# Altium PCB CH340G_Test.PcbDoc
Units mil, origin at the board's own origin, x right, y up, seen from the top; angles counter-clockwise.
Board outline 1720 x 535 mil, 2 copper layers (Top Layer, Bottom Layer), stack 44.685 mil thick; 21 components, 17 nets, 88 pads, 19 vias.
Unrouted connection lines stored in the file: 8.
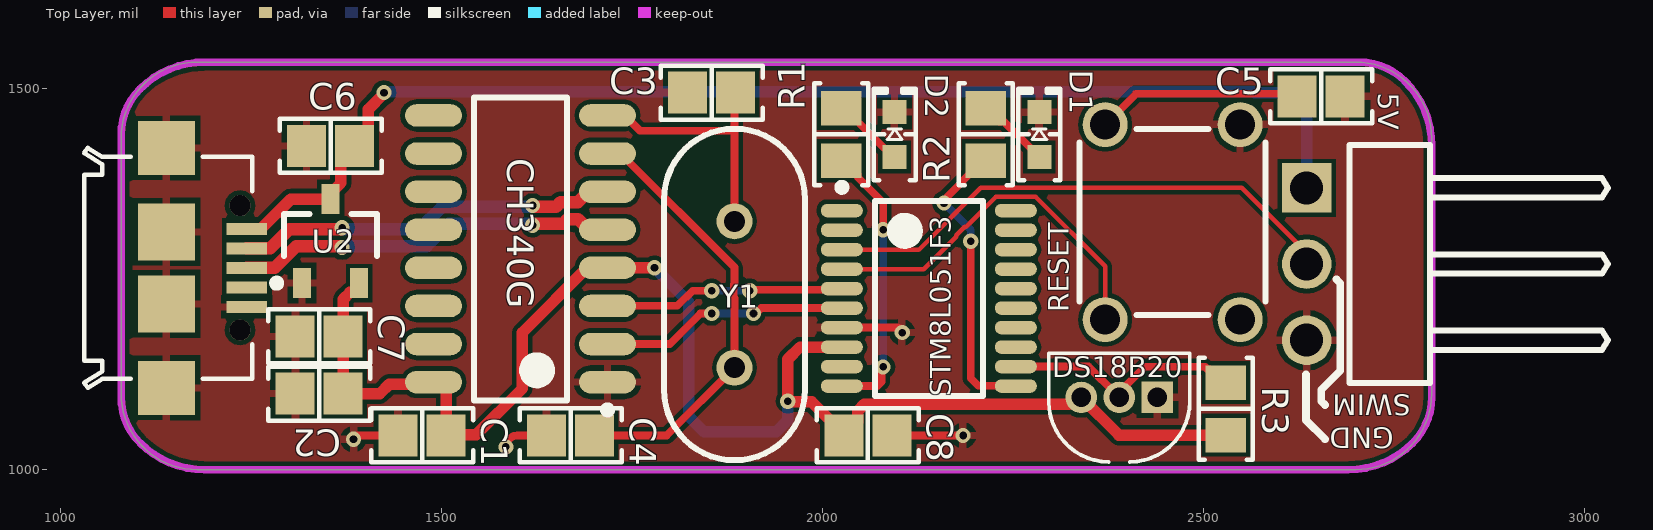
[diagram p0: Top Layer view]
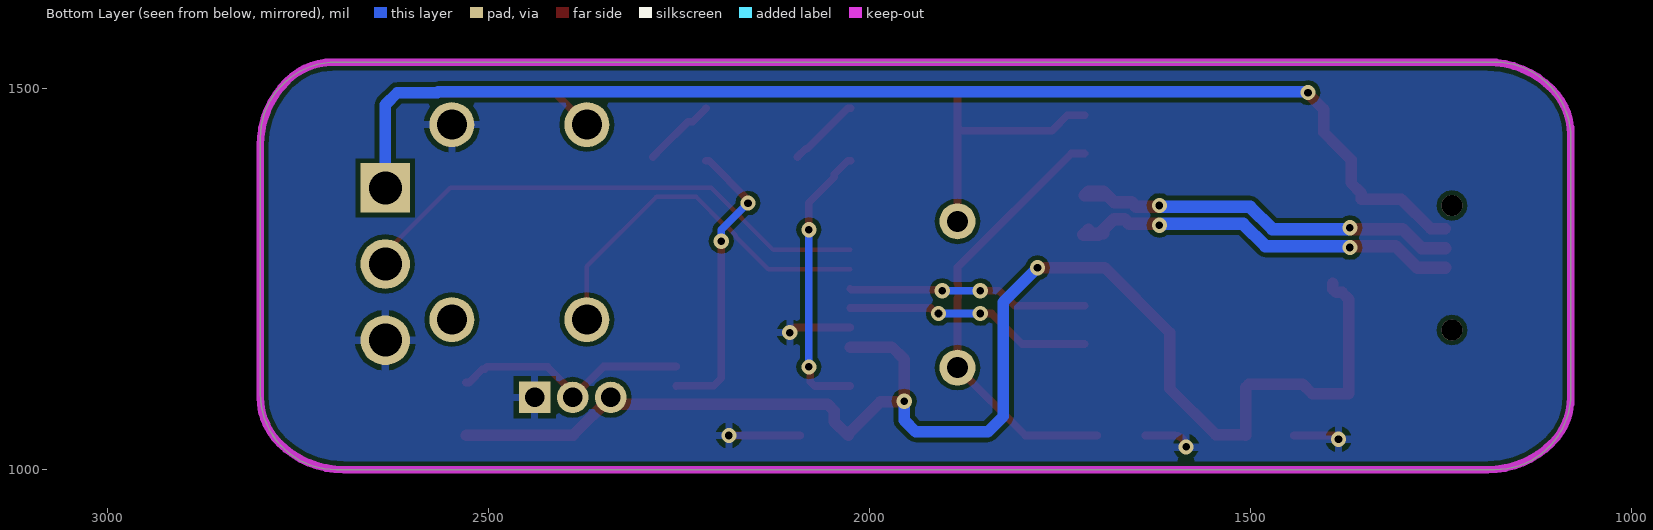
[diagram p1: Bottom Layer view, seen from below]
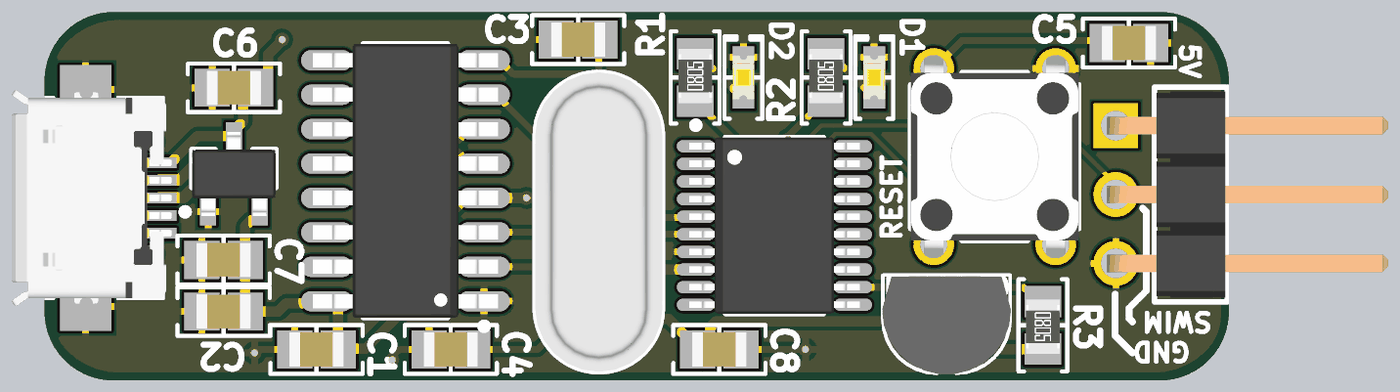
[diagram p2: 3D render of the assembled board from above, using the file's embedded part models]

## Layer stack, top to bottom
Top Solder: solder mask 0.4, Solder Resist, Dk 3.5
Top Layer: signal copper 1.378
Dielectric 1: dielectric 41.9291, FR-4, Dk 4.8
Bottom Layer: signal copper 1.378
Bottom Solder: solder mask 0.4, Solder Resist, Dk 3.5

## Board outline
2700,1535 cw(c2700,1435) 2800,1435 2800,1100 cw(c2700,1100) 2700,1000 1180,1000 cw(c1180,1100) 1080,1100 1080,1435 cw(c1180,1435) 1180,1535

## Design rules (kind name [scope] priority, off if disabled: settings)
Clearance [All] p1: gap=6 ignorepadtopadclearanceinfootprint=FALSE
DiffPairsRouting [InDifferentialPair('D')] p1: maxlimit=12 minlimit=6 mostfreqgap=6 toplayer_minwidth=6 toplayer_maxwidth=16.27 toplayer_prefwidth=16.27 bottomlayer_minwidth=6 bottomlayer_maxwidth=16.27 bottomlayer_prefwidth=16.27 maxuncoupledlength=500
PlaneConnect [All] p1: planeconnectstyle=Relief reliefexpansion=15 reliefentries=4 reliefconductorwidth=10 reliefairgap=5
PolygonConnect [All] p1: connectstyle=Relief reliefconductorwidth=10 reliefentries=4 polygonreliefangle="90 Angle" airgapwidth=7
RoutingVias [All] p1: holewidth=10 width=20 viastyle="Through Hole" minholewidth=10 minwidth=20 maxholewidth=50 maxwidth=60
SolderMaskExpansion [All] p1: expansion=4 istentingtop=FALSE
Width [All] p1: maxlimit=15 minlimit=6 preferedwidth=6 checkconnectedcopper=TRUE
28 further rules are at their usual default settings.

## Classes and differential pairs
differential pair D: +D_P -D_N

## Components (designator, comment, footprint, x,y, rotation, side; value= is the part's Value field where it differs from the comment)
C1 "100nF" "CAP 0805_2012" 1475,1045 r0 top value=0.1µF
C2 "100nF" "CAP 0805_2012" 1340,1100 r0 top value=0.1µF
C3 "15pF" "CAP 0805_2012" 1855,1495 r0 top
C4 "15pF" "CAP 0805_2012" 1670,1045 r0 top
C5 "100nF" "CAP 0805_2012" 2655,1490 r180 top value=0.1µF
C6 "10uF" "CAP 0805_2012" 1355,1425 r0 top value=10µF
C7 "10uF" "CAP 0805_2012" 1340,1175 r0 top value=10µF
C8 "100nF" "CAP 0805_2012" 2060,1045 r0 top value=0.1µF
CH340G "CH340G" CH340G 1604.17,1290 r180 top (schematic designator U1)
D1 "Yellow" "LED 0603_1608 YELLOW" 2285,1440 r90 top
D2 "Yellow" "LED 0603_1608 YELLOW" 2095,1440 r90 top
DS18B20 "DS18B20" DS18B20 2390,1095 r180 top (schematic designator U4)
J1 "Micro USB 2.0 Type B Receptacle" 629105136821 1139.68,1265 r270 top
R1 "1k" "RES 0805_2012" 2025,1440 r90 top value="1 kOhms"
R2 "1k" "RES 0805_2012" 2215,1440 r90 top value="1 kOhms"
R3 "4K7" "RES 0805_2012" 2530,1080 r270 top value="4.7 kOhms"
RESET "" 4301x60507x6 2460,1325 r90 top (schematic designator S1)
STM8L051F3 "STM8L051F3" TSOP65P630X120-20N 2140,1225 r0 top (schematic designator U3)
SWIM "61300311021" 61300311021 2745,1270 r90 top (schematic designator P1)
U2 "ME6209A28M3G" SOT95P285X150-3N 1355,1300 r90 top
Y1 "12MHz" WE-XTAL_HC49/4H 1885,1230 r270 top

## Footprints (in the part's own frame and the unit in brackets; to place one, negate y for a bottom-side part, rotate by r counter-clockwise, add the part's x,y. Pads: shape width x height; smd on the part's side, far side on the other; paste and mask are expansions set on the pad)
4301x60507x6 [mm] "6x6mm Tact Switch, THT version"
  round 1.5 hole 1: 1(-3.25,2.25) 2(-3.25,-2.25) 3(3.25,2.25) 4(3.25,-2.25)
  silkscreen extent -3.1,-3.1 3.1,3.1, body extent -3.95,-3.1 3.95,3.1, height 5.05
61300311021 [mm] "Pin Header, pitch 2.54 mm, THT, Angled, single row, 3p"
  rect 1.65x1.65 hole 1.1: 1(2.54,2.77)
  round 1.65 hole 1.1: 2(0,2.77) 3(-2.54,2.77)
  silkscreen extent -3.96,-7.27 3.96,1.35, body extent -3.81,-7.27 3.81,3.09, height 2.58
629105136821 [mm] "Micro USB 2.0 SMT Type B Horizontal 5 Contacts"
  rect 0.4x1.35 smd: 1(-1.3,2.675) 2(-0.65,2.675) 3(0,2.675) 4(0.65,2.675) 5(1.3,2.675)
  round 0.7 hole 0.7 unplated: MH1(-2.075,2.45) MH2(2.075,2.45)
  rect 1.8x1.9 smd: S1(-4,0) S4(4,0)
  rect 1.9x1.9 smd: S2(-1.2,0) S3(1.2,0)
  silkscreen extent -4,-2.75 4,2.85, body extent -4,-2.73 4,3.17, height 2.69
"CAP 0805_2012" [mm] "Chip Capacitor, 2-Leads, Body 2.00x1.20mm, IPC Medium Density"
  rect 1.3x1.4 smd: 1(-0.8,0) 2(0.8,0)
  silkscreen extent -1.7,-0.9 1.7,0.9, body extent -1,-0.64 1,0.64, height 1.26
CH340G [mm] "TSOP, 16-Leads, Body 10,06x3,90mm, Pitch 1,27mm, IPC Medium Density"
  oval 1.9x0.75 smd: 1(-2.9,4.445) 2(-2.9,3.175) 3(-2.9,1.905) 4(-2.9,0.635) 5(-2.9,-0.635) 6(-2.9,-1.905) 7(-2.9,-3.175) 8(-2.9,-4.445) 9(2.9,-4.445) 10(2.9,-3.175) 11(2.9,-1.905) 12(2.9,-0.635) 13(2.9,0.635) 14(2.9,1.905) 15(2.9,3.175) 16(2.9,4.445)
  silkscreen extent -3.03,-5.05 1.55,5.49, body extent -3.41,-5.05 3.41,5.05, height 1.6
DS18B20 [mm]
  rect 1.05x1.05 hole 0.65: 1(-1.27,0)
  round 1.05 hole 0.65: 2(0,0) 3(1.27,0)
  silkscreen extent -2.35,-1.47 2.35,2.15, body extent -2.38,-1.43 2.38,2.2, height 8.32
"LED 0603_1608 YELLOW" [mm] "Chip Diode, 2-Leads, Body 1.60x0.80mm, IPC Medium Density"
  rect 0.8x0.8 smd: 1(-0.75,0) 2(0.75,0)
  silkscreen extent -1.52,-0.7 1.52,0.7, body extent -0.8,-0.4 0.8,0.4, height 0.53
"RES 0805_2012" [mm] "Chip Resistor, 2-Leads, Body 2.00x1.25mm, IPC Medium Density"
  rect 1.15x1.35 smd: 1(-0.875,0) 2(0.875,0)
  silkscreen extent -1.7,-0.9 1.7,0.9, body extent -0.95,-0.62 1.05,0.63, height 0.6
SOT95P285X150-3N [mm] "SOT23, 3-Leads, Body 2,95x2,85mm, Pitch 0,95mm, IPC Medium Density"
  rect 1x0.6 smd: 1(-1.4,0.95) 2(-1.4,-0.95) 3(1.4,0)
  silkscreen extent -1.52,-1.55 0.9,1.92, body extent -1.55,-1.55 1.55,1.55, height 1.5
TSOP65P630X120-20N [mm] "TSOP, 20-Leads, Body 6,45x4,35mm, Pitch 0,65mm, IPC Medium Density"
  oval 1.4x0.45 smd: 1(-2.9,2.925) 2(-2.9,2.275) 3(-2.9,1.625) 4(-2.9,0.975) 5(-2.9,0.325) 6(-2.9,-0.325) 7(-2.9,-0.975) 8(-2.9,-1.625) 9(-2.9,-2.275) 10(-2.9,-2.925) 11(2.9,-2.925) 12(2.9,-2.275) 13(2.9,-1.625) 14(2.9,-0.975) 15(2.9,-0.325) 16(2.9,0.325) 17(2.9,0.975) 18(2.9,1.625) 19(2.9,2.275) 20(2.9,2.925)
  silkscreen extent -3.02,-3.25 1.8,3.82, body extent -3.15,-3.25 3.15,3.25, height 1.2
WE-XTAL_HC49/4H [mm] "Quartz Crystal, size HC49/4H, body 11.05x4.7mm"
  round 1.2 hole 0.7: 1(-2.44,0) 2(2.44,0)
  silkscreen extent -5.53,-2.35 5.53,2.35, body extent -5.52,-2.35 5.53,2.35, height 4.15

## Part data
C1 C2 C5 C8: library part AC0805KKX8R9BB104, "CAP CER 0805 10% X8R 50V 100NF", Capacitance=0.1µF, Device Package="0805 (2012 Metric)", Manufacturer=Yageo, Operating Temperature="-55°C ~ 150°C", Ratings=AEC-Q200, Supplier Part Number 1=311-4624-1-ND, Temperature Coefficient=X8R, Tolerance=±10%, Voltage - Rated=50V, Applications=Automotive, ComponentLink1Description=Datasheet, ComponentLink1URL=http://www.yageo.com/documents/recent/AC0805KKX8R9BB104.pdf, ComponentLink2Description="DigiKey Link", ComponentLink2URL=http://digikey.com/product-detail/en/yageo/AC0805KKX8R9BB104/311-4624-1-ND/9699550, LastUpdated="21/01/2020 00:02:48", Lifecycle Status=Active, Minimum Order=1, Mounting Type="Surface Mount, MLCC", Package / Case="0805 (2012 Metric)", Packaging=TapeAndReel, Part Number=AC0805KKX8R9BB104, Part Status=Active, PartId=14076, Price=0.06, Series=AC, Size / Dimension="0.079\" L x 0.049\" W (2.00mm x 1.25mm)", Supplier 1=DigiKey, Thickness (Max)="0.057\" (1.45mm)"
C3 C4: library part 885012007029, "CAP CER 15PF 25V C0G/NP0 0805", Device Package="0805 (2012 Metric)", Manufacturer="Würth Elektronik", Operating Temperature="-55°C ~ 125°C", Supplier Part Number 1=732-7828-1-ND, Temperature Coefficient="C0G, NP0", Tolerance=±5%, Voltage - Rated=25V, Applications="General Purpose", Capacitance=15pF, ComponentLink1Description=Datasheet, ComponentLink1URL=https://katalog.we-online.de/pbs/datasheet/885012007029.pdf, ComponentLink2Description="DigiKey Link", ComponentLink2URL=http://digikey.com/product-detail/en/w-rth-elektronik/885012007029/732-7828-1-ND/5454455, LastUpdated="21/01/2020 00:03:03", Lifecycle Status=Active, Minimum Order=1, Mounting Type="Surface Mount, MLCC", Package / Case="0805 (2012 Metric)", Packaging=TapeAndReel, Part Number=885012007029, Part Status=Active, PartId=4245, Price=0.03, Series=WCAP-CSGP, Size / Dimension="0.079\" L x 0.049\" W (2.00mm x 1.25mm)", Supplier 1=DigiKey, Thickness (Max)="0.028\" (0.70mm)"
C6 C7: library part C0805X106K9RAC7800, "CAP CER 10UF 6.3V X7R 0805", Capacitance=10µF, Device Package="0805 (2012 Metric)", Manufacturer=KEMET, Operating Temperature="-55°C ~ 125°C", Supplier Part Number 1=399-15697-1-ND, Temperature Coefficient=X7R, Tolerance=±10%, Voltage - Rated=6.3V, Applications="Boardflex Sensitive", ComponentLink1Description=Datasheet, ComponentLink1URL=https://api.kemet.com/component-edge/download/datasheet/C0805X106K9RAC7800.pdf, ComponentLink2Description="DigiKey Link", ComponentLink2URL=http://digikey.com/product-detail/en/kemet/C0805X106K9RAC7800/399-15697-1-ND/7427577, Features="Soft Termination", LastUpdated="21/01/2020 00:03:05", Lifecycle Status=Active, Minimum Order=1, Mounting Type="Surface Mount, MLCC", Package / Case="0805 (2012 Metric)", Packaging=TapeAndReel, Part Number=C0805X106K9RAC7800, Part Status=Active, PartId=2913, Price=0.24, Series="SMD Comm X7R Flex", Size / Dimension="0.079\" L x 0.049\" W (2.00mm x 1.25mm)", Supplier 1=DigiKey, Thickness (Max)="0.057\" (1.45mm)"
D1 D2: library part BL-HKC36D-AV-TRB, "0603 YELLOW", Current - Test=20mA, Device Package="0603 (1608 Metric)", Lens Color=Colorless, Manufacturer="American Bright Optoelectronics Corporation", Millicandela Rating=120mcd, Supplier Device Package=0603, Supplier Part Number 1=BL-HKC36D-AV-TRBCT-ND, Voltage - Forward (Vf) (Typ)=2V, Color=Yellow, ComponentLink1Description=Datasheet, ComponentLink1URL=http://americanbrightled.com/pdffiles/smt/BL-HKC36D-AV-TRB.pdf, ComponentLink2Description="DigiKey Link", ComponentLink2URL=http://digikey.com/product-detail/en/american-bright-optoelectronics-corporation/BL-HKC36D-AV-TRB/BL-HKC36D-AV-TRBCT-ND/9678339, Configuration=0603, Height (Max)=0.85mm, LastUpdated="21/01/2020 03:15:05", Lens Size="0.87mm x 0.80mm", Lens Style="Rectangle with Flat Top", Lens Transparency=Clear, Lifecycle Status=Active, Minimum Order=1, Mounting Type="Surface Mount", Package / Case="0603 (1608 Metric)", Packaging=TapeAndReel, Part Number=BL-HKC36D-AV-TRB, Part Status=Active, PartId=82, Price=0.06, Series=-, Size / Dimension="1.60mm L x 0.80mm W", Supplier 1=DigiKey, Viewing Angle=120°, Wavelength - Dominant=589nm, Wavelength - Peak=590nm
J1: library part 629105136821, "Micro USB 2.0 Type B, Receptacle, Horizontal, SMT", Operating Temperature="-40 to +105degC", Rated Current=1A, Working Voltage=30VAC, Application="Micro USB 2.0", ComponentLink1Description=Manufacturer, ComponentLink1URL=http://www.we-online.de, ComponentLink2Description=Datasheet, ComponentLink2URL=https://katalog.we-online.com/em/datasheet/629105136821.pdf, Gender=Receptacle, Interface Type="Type B", Mounting Technology=SMT, Packaging="Tape and Reel", Part Number=629105136821, Pin Number=5, Published Date="September 2019", Publisher="Wurth Elektronik", Type=Horizontal
R1 R2: library part RCG08051K00FKEA, "RES SMD 1K OHM 1% 1/8W 0805", Device Package="0805 (2012 Metric)", Manufacturer="Vishay Dale", Operating Temperature="-55°C ~ 155°C", Power (Watts)="0.125W, 1/8W", Resistance="1 kOhms", Supplier Device Package=0805, Supplier Part Number 1=541-1817-1-ND, Temperature Coefficient=±100ppm/°C, Tolerance=±1%, ComponentLink1Description=Datasheet, ComponentLink1URL=http://www.vishay.com/docs/20047/rcge3.pdf, ComponentLink2Description="DigiKey Link", ComponentLink2URL=http://digikey.com/product-detail/en/vishay-dale/RCG08051K00FKEA/541-1817-1-ND/4172576, Composition="Thick Film", Height - Seated (Max)="0.020\" (0.50mm)", LastUpdated="21/01/2020 01:49:21", Lifecycle Status=Active, Minimum Order=1, Number of Terminations=2, Package / Case="0805 (2012 Metric)", Packaging=TapeAndReel, Part Number=RCG08051K00FKEA, Part Status=Active, PartId=29401, Price=0.01, Series=RCG, Size / Dimension="0.079\" L x 0.049\" W (2.00mm x 1.25mm)", Supplier 1=DigiKey
R3: library part RCS08054K70JNEA, "RES SMD 4.7K OHM 5% 0.4W 0805", Device Package="0805 (2012 Metric)", Manufacturer="Vishay Dale", Operating Temperature="-55°C ~ 155°C", Power (Watts)="0.4W, 2/5W", Ratings=AEC-Q200, Resistance="4.7 kOhms", Supplier Device Package=0805, Supplier Part Number 1=541-2866-1-ND, Temperature Coefficient=±200ppm/°C, Tolerance=±5%, ComponentLink1Description=Datasheet, ComponentLink1URL=http://www.vishay.com/docs/20065/rcse3.pdf, ComponentLink2Description="DigiKey Link", ComponentLink2URL=http://digikey.com/product-detail/en/vishay-dale/RCS08054K70JNEA/541-2866-1-ND/5867159, Composition="Thick Film", Features="Automotive AEC-Q200, Pulse Withstanding", Height - Seated (Max)="0.020\" (0.50mm)", LastUpdated="21/01/2020 01:50:02", Lifecycle Status=Active, Minimum Order=1, Number of Terminations=2, Package / Case="0805 (2012 Metric)", Packaging=TapeAndReel, Part Number=RCS08054K70JNEA, Part Status=Active, PartId=27839, Price=0.02, Series="AccliMate™ RCU", Size / Dimension="0.079\" L x 0.049\" W (2.00mm x 1.25mm)", Supplier 1=DigiKey
RESET: library part 430156050726, "WS-TATV THT Tact Switch 6x6mm, height 5mm, 260gf", Operating Temperature="-40 to +85degC", Rated Current=50mA, Rated Voltage=12VDC, ComponentLink1Description=Manufacturer, ComponentLink1URL=http://www.we-online.de, ComponentLink2Description=Datasheet, ComponentLink2URL=https://katalog.we-online.com/em/datasheet/430156050726.pdf, Contact Material="Stainless Steel", Contact Plating=Silver, Height=5mm, Mounting Technology=THT, Operation Force=260gf, Packaging=Bulk, Part Number=430156050726, Published Date="September 2019", Publisher="Wurth Elektronik", Terminal Material="Copper Alloy", Terminal Plating=Silver, Washable=No
SWIM: "WR-PHD Pin Header, THT, pitch 2.54mm, Single Row, Angled, 3p", Contact Resistance=20mOhm, Manufacturer="Wurth Elektronik", Operating Temperature="-40 to +105degC", Rated Current=3A, Withstanding Voltage=500VAC, Working Voltage=250VAC, ComponentLink1Description=Manufacturer, ComponentLink1URL=http://www.we-online.de, ComponentLink2Description=Datasheet, ComponentLink2URL=https://www.we-online.com/catalog/datasheet/61300311021.pdf, Gender="Pin Header", Manufacturer Part Number=61300311021, Mounting Technology=THT, Orientation=Angled, Packaging=Bag, Pin Number=3, Pitch=2.54mm, Published Date="May 2020", Row Number=Single
U2: library part ME6209
Y1: library part 830014948B, "WE-XTAL Quartz Crystal, size HC49 12MHz", Frequency=27.12MHz, Frequency Stability=50ppm, Frequency Tolerance=+/-30ppm, Load Capacitance=-, Operating Temperature="-10 up to +60degC", ComponentLink1Description=Manufacturer, ComponentLink1URL=http://www.we-online.de, ComponentLink2Description=Datasheet, ComponentLink2URL=https://katalog.we-online.com/pbs/datasheet/830014948B.pdf, Mounting Technology=THT, Packaging=Bulk, Part Number=830014948B, Published Date="March 2019", Publisher="Wurth Elektronik", Size=HC49-4H

## Via types
v1: diameter 20, hole 10, Top Layer to Bottom Layer, tented both sides, 19 vias

## Nets (pads, with @x,y where several pads share a name; then routed paths per layer and width w, separated by ;. In a path a pad name is that pad's centre, name@x,y a point inside that pad or via, vN(x,y) a via of type N, cw(c..) or ccw(c..) an arc to the next point about the centre after c; other vN are vias at no path point)
1WireBus: DS18B20.2 R3.1 STM8L051F3.12 | length 321.7
  Top Layer w10: STM8L051F3.12 2349.57,1135.43 2386.55,1098.45 DS18B20.2 2390,1101.89 2423.11,1135 2502.57,1135 2505.48,1132.09 2508.43,1132.09 2526.06,1114.45 R3.1
2V8: C1.2 C2.2 C7.2 C8.1 CH340G.4 CH340G.16 DS18B20.3 R3.2 STM8L051F3.8 U2.2 | length 1926.5
  Top Layer w15: U2.2 1392.4,1237.01 1388.09,1232.7 1380.28,1232.7 1371.5,1223.91 C7.2 C2.2 1419.59,1100 1431.81,1112.22 1502.56,1112.22 1506.5,1108.29 C1.2 1507.3,1045.8 1545.8,1045.8 1606.67,1106.67 1606.67,1180.14 1691.54,1265 CH340G.4@1714.17,1265 ; CH340G.4 v1(1780,1265) ; STM8L051F3.8 1971.02,1161.02 1955,1145 v1(1955,1090) 1955.96,1089.04 1986.43,1089.04 2028.5,1046.97 C8.1 2046.59,1063.09 2046.59,1077.27 2055.38,1086.06 2323.93,1086.06 2332.87,1095 DS18B20.3 2389.45,1045.55 R3.2
  Bottom Layer w15: v1(1780,1265) 1825,1220 1825,1070 1845,1050 1940,1050 1955,1065 v1(1955,1090)
5V: C6.2 J1.1 SWIM.1 U2.3 | length 1622.4
  Top Layer w15: J1.1 1263.7,1316.18 1302.64,1355.12 U2.3 1355,1362.99 1368.41,1376.4 1368.41,1406.91 C6.2 1404.59,1443.09 1404.59,1473.23 1425,1493.65 v1(1425,1495)
  Bottom Layer w15: v1(1425,1495) 1425.98,1495.98 2566.41,1495.98 2567.39,1495 2620,1495 2635.94,1479.06 SWIM.1
D_N: CH340G.6 J1.2 | length 534.3
  Top Layer w16.27: J1.2 1245.26,1290.85 1275.85,1290.85 1300.75,1315.75 1368.13,1315.75 v1(1370,1317.61) ; v1(1620,1346.87) 1621.01,1346.87 1622.88,1345 1650.71,1345 1656.85,1351.13 1679.55,1351.13 1693.42,1365 1713.35,1365 1718.35,1360 CH340G.6@1693.42,1360
  Bottom Layer w16.27: v1(1370,1317.61) 1371.01,1317.61 1372.88,1315.75 1471.74,1315.75 1500.99,1345 1618.13,1345 v1(1620,1346.87)
D_P: CH340G.5 J1.3 | length 544.9
  Top Layer w16.27: J1.3 1245.26,1265.26 1281.75,1265.26 1309.97,1293.48 1368.13,1293.48 v1(1370,1291.61) ; v1(1620,1320.87) 1621.01,1320.87 1622.88,1322.73 1659.94,1322.73 1666.07,1328.87 1679.55,1328.87 CH340G.5@1698.42,1310 ; CH340G.5@1693.42,1310 CH340G.5@1698.42,1310 ; CH340G.5@1713.35,1315 1718.35,1310 CH340G.5@1698.42,1310 ; CH340G.5@1719.87,1308.48 1699.94,1308.48 CH340G.5@1698.42,1310
  Bottom Layer w16.27: v1(1370,1291.61) 1371.01,1291.61 1372.88,1293.48 1480.96,1293.48 1510.21,1322.73 1615,1322.73 1616.87,1320.87 v1(1620,1320.87)
GND: C1.1 C2.1 C3.1 C4.1 C5.1 C6.1 C7.1 C8.2 CH340G.1 D1.2 D2.2 DS18B20.1 J1.5 J1.S1 J1.S2 J1.S3 J1.S4 RESET.4 STM8L051F3.7 SWIM.3 U2.1 | length 299.9
  Top Layer w10: v1(1385,1040) cw(c1390,1040) 1390,1045 C1.1 ; v1(1585,1030) cw(c1600,1030) 1600,1045 C4.1 ; STM8L051F3.7 2098.39,1186.61 cw(c2098.39,1180) v1(2105,1180) ; C8.2 v1(2185,1045)
NetC3_2: C3.2 CH340G.8 Y1.1 | length 346.6
  Top Layer w10: CH340G.8 1740.98,1465 1760.98,1445 1880,1445 1885,1450 ; Y1.1 1885,1445 1885,1450 ; C3.2 1885,1493.5 1885,1450
NetC4_2: C4.2 CH340G.7 Y1.2 | length 581.4
  Top Layer w10: C4.2 1796.06,1045 Y1.2 1885,1225.3 1884,1226.3 1884,1243.7 1885,1244.7 1885,1265.7 1735.7,1415 CH340G.7
NetC5_2: C5.2 RESET.3 | length 270.3
  Top Layer w10: RESET.3 2411.94,1493.48 2620.02,1493.48 C5.2
NetD1_1: D1.1 R2.2 | length 96.5
  Top Layer w10: R2.2 2232.64,1456.81 2238.66,1456.81 2274.25,1421.22 D1.1
NetD2_1: D2.1 R1.2 | length 96.5
  Top Layer w10: R1.2 2028.94,1474.45 2082.17,1421.22 2084.25,1421.22 D2.1
NetR1_1: R1.1 STM8L051F3.10 | length 370.4
  Top Layer w10: R1.1 2028.94,1405.55 2046.57,1387.91 2046.57,1383.98 2080,1350.55 v1(2080,1315) ; STM8L051F3.10 2072.23,1109.84 2078.09,1115.7 2078.09,1133.09 v1(2080,1135)
  Bottom Layer w10: v1(2080,1135) v1(2080,1315)
NetR2_1: R2.1 STM8L051F3.11 | length 388.5
  Top Layer w10: v1(2160,1350) 2160,1354.49 2211.06,1405.55 R2.1 ; v1(2195,1300) 2195,1120 2205,1110 2254.02,1110 STM8L051F3.11
  Bottom Layer w10: v1(2160,1350) 2195,1315 v1(2195,1300)
NRST: RESET.1 STM8L051F3.4 | length 493.5
  Top Layer w6: STM8L051F3.4 2133.45,1263.39 2176,1305.94 2176,1307.87 2187.13,1319 2189.06,1319 2228.08,1358.02 2280.27,1358.02 2371.42,1266.87 RESET.1
RX: CH340G.2 STM8L051F3.6 | length 327
  Top Layer w10: CH340G.2 1800,1165 1840,1205 v1(1855,1205) ; v1(1910,1205) 1912.71,1205 1919.91,1212.2 STM8L051F3.6
  Bottom Layer w10: v1(1855,1205) v1(1910,1205)
SWIM: STM8L051F3.3 SWIM.2 | length 693.9
  Top Layer w6: STM8L051F3.3 2127.07,1288.98 2208.11,1370.02 2550.93,1370.02 2635.94,1285 SWIM.2
TX: CH340G.3 STM8L051F3.5 | length 316.9
  Top Layer w10: CH340G.3 1810,1215 1830,1235 v1(1855,1235) ; v1(1905,1235) 1906.4,1236.4 2024.43,1236.4 STM8L051F3.5
  Bottom Layer w10: v1(1855,1235) v1(1905,1235)
pads on no net: CH340G.9 CH340G.10 CH340G.11 CH340G.12 CH340G.13 CH340G.14 CH340G.15 J1.4 J1.MH1 J1.MH2 RESET.2 STM8L051F3.1 STM8L051F3.2 STM8L051F3.9 STM8L051F3.13 STM8L051F3.14 STM8L051F3.15 STM8L051F3.16 STM8L051F3.17 STM8L051F3.18 STM8L051F3.19 STM8L051F3.20

## Polygon pours and split planes (outlines as drawn)
GND on Top Layer "GND_L01_P000" (solid, remove dead copper, pour order 0): 2700,1535 cw(c2700,1435) 2800,1435 2800,1100 cw(c2700,1100) 2700,1000 1180,1000 cw(c1180,1100) 1080,1100 1080,1435 cw(c1180,1435) 1180,1535
GND on Bottom Layer "GND_L02_P001" (solid, remove dead copper, pour order 1): 2700,1535 cw(c2700,1435) 2800,1435 2800,1095.36 cw(c2704.64,1095.36) 2704.64,1000 1180,1000 cw(c1180,1100) 1080,1100 1080,1435 cw(c1180,1435) 1180,1535

## Keep-outs
Keep-Out Layer:
  lines w10: 1080,1095.36 ccw(c1165.36,1095.36) 1105,1035 ccw(c1189.5,1119.5) 1189.5,1000 1755,1000 2690.5,1000 ccw(c2690.5,1119.5) 2775,1035 ccw(c2714.64,1095.36) 2800,1095.36 2800,1425.5 ccw(c2680.5,1425.5) 2765,1510 ccw(c2704.64,1449.64) 2704.64,1535 1995,1535 1189.85,1535 ccw(c1189.85,1414.64) 1104.75,1499.75 ccw(c1164.5,1440) 1080,1440 1080,1095.36

## Silkscreen, mask and mechanical layers (free items; w line width, h text height)
Top Overlay:
  lines w10: 2635,1125 2635,1075 2635,1065 2660,1040 ; 2660,1085 2655,1090 2655,1105 2680,1130 2680,1160 2680,1245 2675,1250
  text "5V" at 2730,1495 h27 r270
  text "GND" at 2750,1055 h27 r180

## Text inside footprints (layer, text, board x,y; h text height)
J1: Mechanical 2 "PCB Edge" at 1057.01,1312.24 h16 r270